# EAGLE board SOT23-8_BREAKOUT (EAGLE 5.10)
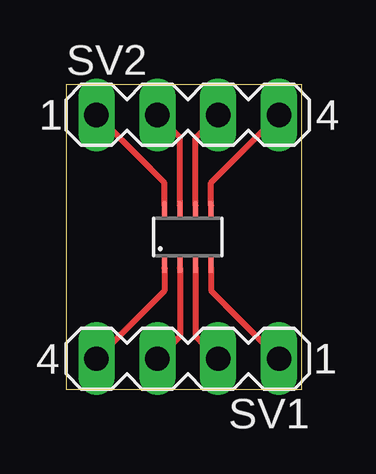
[diagram p0: board, top side]

Size 9.83 x 12.69 mm. Coordinates in mm from the lower left corner, seen from the top.
Outline: 0,0 9.83,0 9.83,12.69 0,12.69 0,0
Copper layers (1*16): Top 0.035mm / dielectric 1.5mm / Bottom 0.035mm
Design rules "default": minimum track width 10mil, minimum drill 24mil, track to track 8mil, track to pad 8mil, pad to pad 8mil, via to via 8mil, smd to smd 8mil, copper to edge 40mil, drill to drill 8mil, minimum pad ring 10mil, minimum via ring 8mil, stop-mask expansion 4mil, vias tented up to drill 0mil, thermal gap 10mil

## Footprints (pad centres in the part's own frame; a part is rotated, then mirrored left to right if it is on the bottom)
MA04-1 = drill 1.016 long: 1 -3.81,0; 2 -1.27,0; 3 1.27,0; 4 3.81,0
SOT23-8 = smd 0.203 x 0.406: 1 -0.975,-1.3; 2 -0.325,-1.3; 3 0.325,-1.3; 4 0.975,-1.3; 5 0.975,1.3; 6 0.325,1.3; 7 -0.325,1.3; 8 -0.975,1.3; P$3 -0.975,0.975; P$4 0.325,0.975; P$7 -0.325,0.975; P$8 0.975,0.975; P$9 -0.975,-0.975; P$10 -0.325,-0.975; P$11 0.325,-0.975; P$12 0.975,-0.975

## Placement (x,y rotation side)
SV1  [MA04-1]  5.08,1.27 180 top
SV2  [MA04-1]  5.08,11.43 0 top
U$1  SOT23-8  [SOT23-8]  5.08,6.35 0 top

## Library data of the parts
SV1 SV2 = con-lstb
U$1 = custom

## Nets
N$1: SV1.4 U$1.1
N$2: SV1.3 U$1.2
N$3: SV1.2 U$1.3
N$4: SV1.1 U$1.4
N$5: SV2.4 U$1.5
N$6: SV2.3 U$1.6
N$7: SV2.2 U$1.7
N$8: SV2.1 U$1.8

## Tracks (layer width: path | path; a pad name or v marks a point on that pad's centre or on a via)
N$1
  Top 0.254: U$1.1 4.11,4.11 SV1.4
N$2
  Top 0.254: U$1.2 4.75,2.21 SV1.3
N$3
  Top 0.254: U$1.3 5.41,2.21 SV1.2
N$4
  Top 0.254: U$1.4 6.05,4.11 SV1.1
N$5
  Top 0.254: U$1.5 6.05,8.6 SV2.4
N$6
  Top 0.254: U$1.6 5.41,10.48 SV2.3
N$7
  Top 0.254: U$1.7 4.75,10.48 SV2.2
N$8
  Top 0.254: U$1.8 4.11,8.6 SV2.1